# Altium PCB STM8S103_FM1702.PcbDoc
Units mil, origin at the board's own origin, x right, y up, seen from the top; angles counter-clockwise.
Board outline 2660.03 x 1670.03 mil, 2 copper layers (Top Layer, Bottom Layer); 63 components, 54 nets, 258 pads, 49 vias.
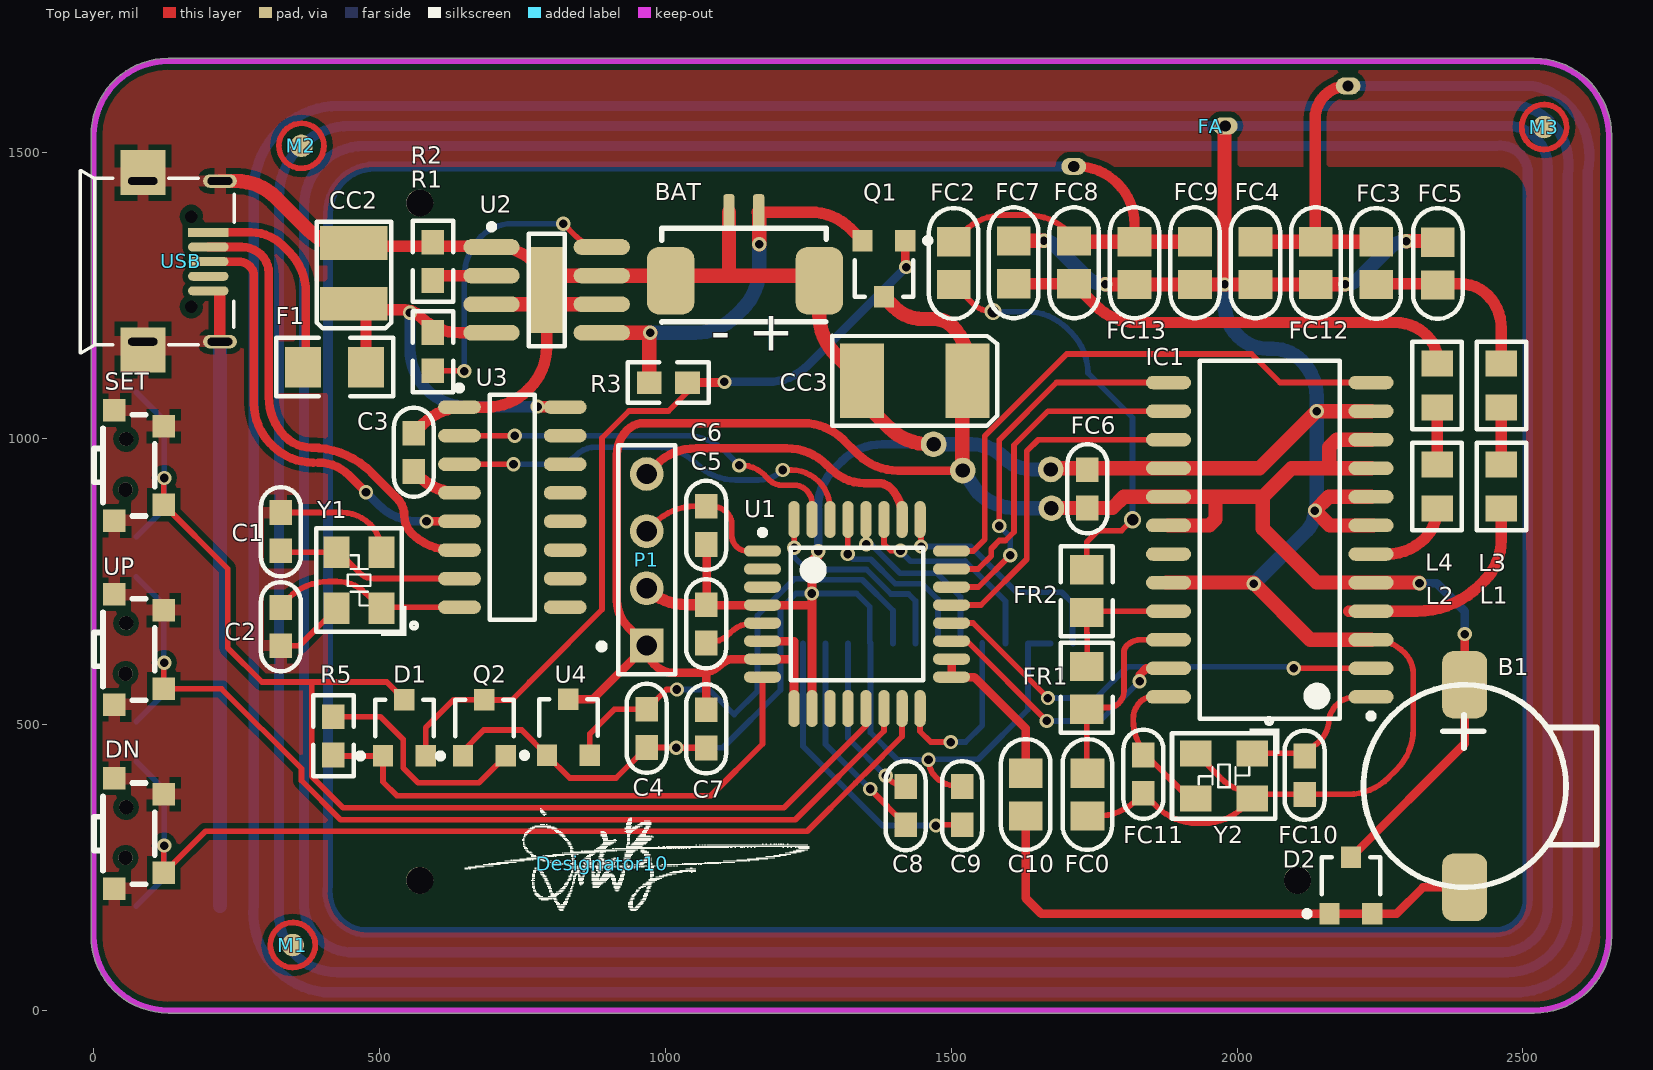
[diagram p0: Top Layer view]
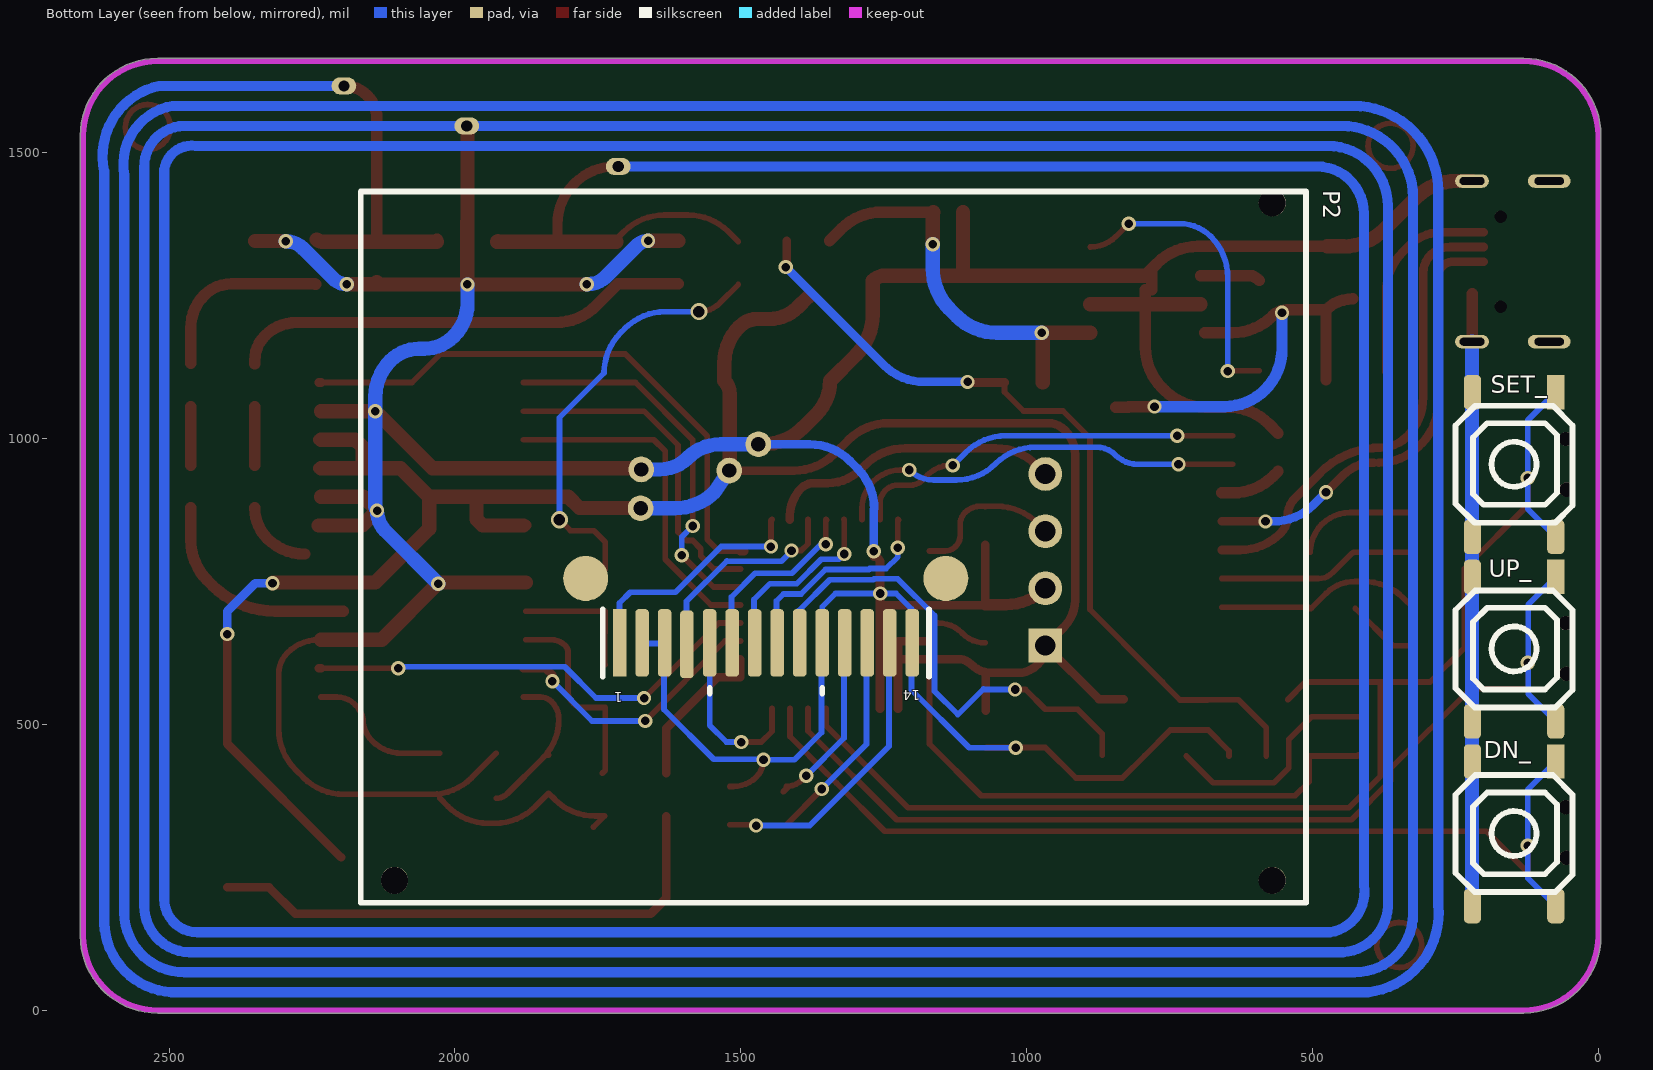
[diagram p1: Bottom Layer view, seen from below]
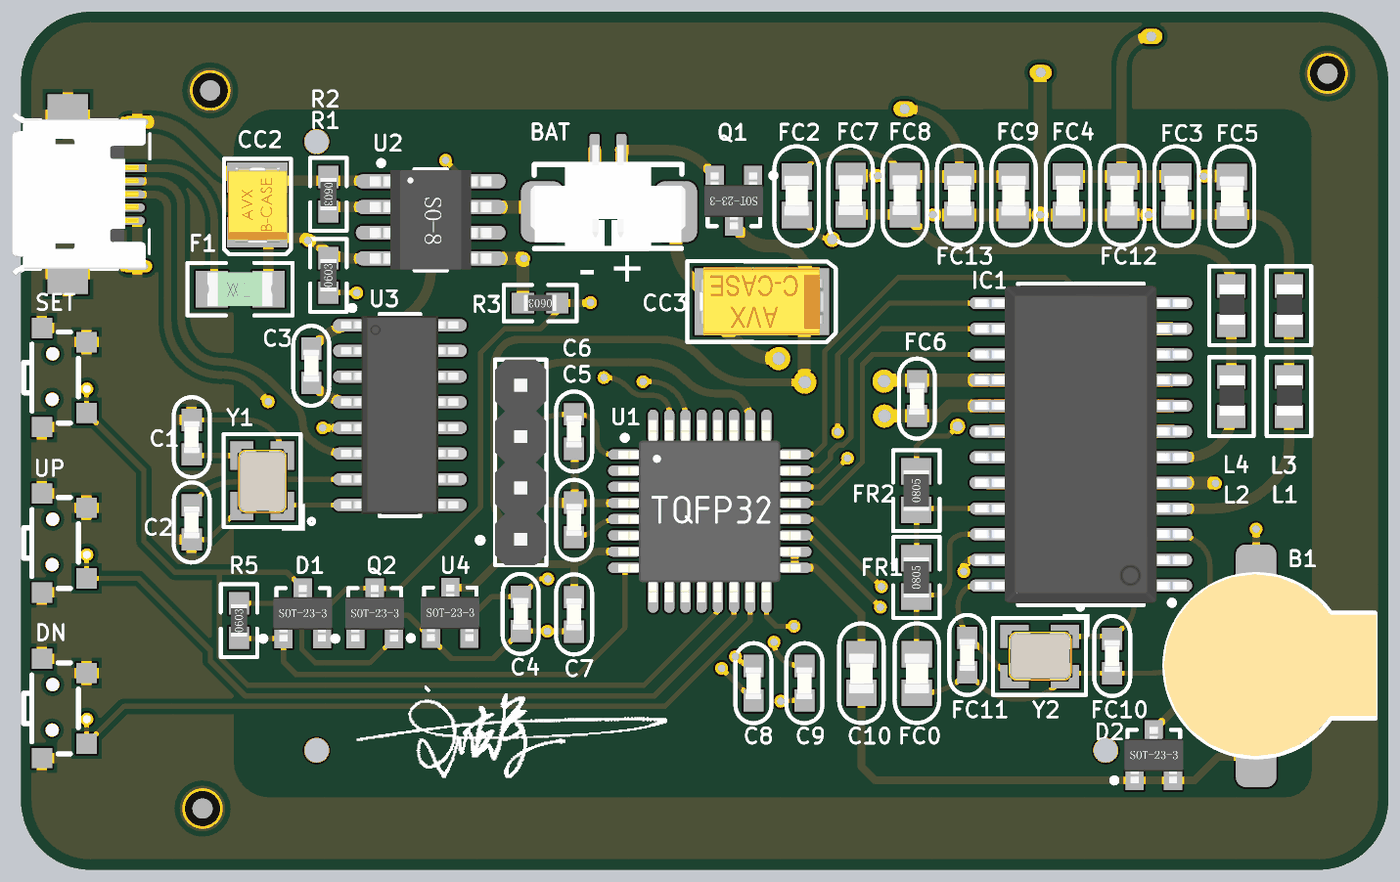
[diagram p2: 3D render of the assembled board from above, using the file's embedded part models]
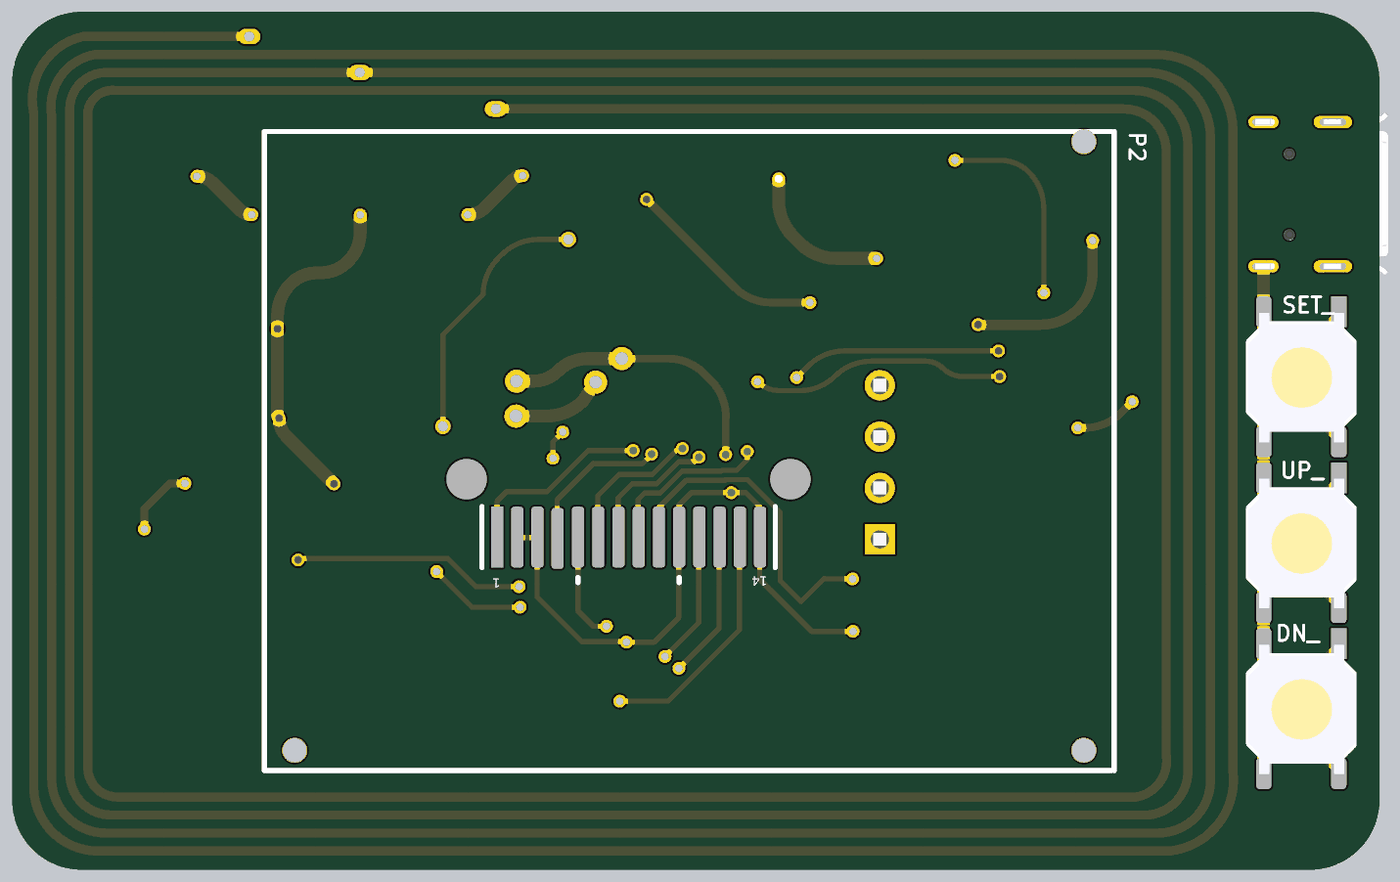
[diagram p3: 3D render of the assembled board from below, using the file's embedded part models]

## Layer stack, top to bottom
Top Solder: solder mask 0.4, Solder Resist, Dk 3.5
Top Layer: signal copper 1.4
Dielectric1: dielectric 12.6, FR-4, Dk 4.8
Bottom Layer: signal copper 1.4
Bottom Solder: solder mask 0.4, Solder Resist, Dk 3.5

## Board outline
-4.45,117.69 cw(c0,120) -5.02,120 -5.02,1530 cw(c130,1530) 130,1665.02 2520,1665.02 cw(c2520,1530) 2655.02,1530 2655.02,130 cw(c2520,130) 2520,-5.01 130,-5.01 cw(c130,130)

## Design rules (kind name [scope] priority, off if disabled: settings)
Clearance poly [inpolygon] p1: gap=10
Clearance [All] p2: gap=8
ComponentClearance [All] p1: gap=0 collisioncheckmode=3 verticalgap=0 showdistances=FALSE
FabricationTestPointUsage TestPointUsage [All] p1: valid=0 allowmultiple=FALSE
FabricationTestpoint Testpoint [All] p1: side=3 testpointundercomponent=TRUE minsize=40 maxsize=100 preferedsize=60 minholesize=0 maxholesize=40 preferedholesize=32 testpointgrid=1 allowsidetop=TRUE allowsidebottom=TRUE usegrid=TRUE gridtolerance=0.01
HoleSize [All] p1: absolutevalues=TRUE maxlimit=150 minlimit=10 maxpercent=80.000 minpercent=20.000
PolygonConnect [All] p1: connectstyle=Relief reliefconductorwidth=20 reliefentries=4 polygonreliefangle="90 Angle" airgapwidth=10
RoutingVias [All] p1: holewidth=28 width=50 viastyle="Through Hole" minholewidth=28 minwidth=50 maxholewidth=28 maxwidth=50
SilkToSilkClearance [All] p1: silktosilkclearance=0
SolderMaskExpansion [All] p1: expansion=4
UnpouredPolygon [All] p1: allowunpoured=FALSE
Width [All] p1: maxlimit=50 minlimit=10 preferedwidth=20 bottomlayer_prefwidth=10 minimp=50.000000 maximp=50.000000 favimp=50.000000
24 further rules are at their usual default settings.

## Components (designator, comment, footprint, x,y, rotation, side; value= is the part's Value field where it differs from the comment)
B1 "BUZZER" BUZZ_9025 2398,392 r90 top
BAT "Battery" HX1.25-2 1289,1405 r180 top
C1 "C0603" C0603 327,837 r90 top
C2 "C0603" C0603 327,671 r270 top
C3 "C0603" C0603 559.57,976 r270 top
C4 "C0603" C0603 967,493 r270 top
C5 "C0603" C0603 1071,676 r90 top
C6 "C0603" C0603 1071,848 r270 top
C7 "C0603" C0603 1071,492 r270 top
C8 "C0603" C0603 1420,358 r90 top
C9 "C0603" C0603 1519,358 r90 top
C10 "C0805" C0805 1630,377 r90 top
CC2 "Cap Tan B" TAN-B-3528 455,1289 r270 top
CC3 "Cap Tan C" TAN-C-6032 1436,1101 r0 top
D1 "BAS40_5" SOT-23 543,494 r0 top
D2 "BAS40_5" SOT-23 2199,218 r0 top
Designator10 "Comment" LOGO 889,257 r0 top
DN "Button" BUTTON_SMD 79,309 r90 top
DN_ "Button" SWITCH_SMD 147,309 r270 bottom
F1 "300mA" F1206 421,1125 r0 top
FA "FM1702_Antenna" FM1702_ANTENNA 1834,1436 r180 top locked
FC0 "C0805" C0805 1738,377 r90 top
FC2 "C0805" C0805 1504,1307 r270 top
FC3 "C0805" C0805 2243.29,1307 r270 top
FC4 "C0805" C0805 2031.86,1307 r90 top
FC5 "C0805" C0805 2351,1306 r90 top
FC6 "C0603" C0603 1738,912 r90 top
FC7 "C0805" C0805 1609,1308 r270 top
FC8 "C0805" C0805 1714.71,1308 r270 top
FC9 "C0805" C0805 1926.14,1307 r90 top
FC10 "C0603" C0603 2118,411 r270 top
FC11 "C0603" C0603 1836,413 r270 top
FC12 "C0805" C0805 2137.57,1307 r90 top
FC13 "C0805" C0805 1820.43,1307 r90 top
FR1 "?" R0805 1737,564 r90 top
FR2 "?" R0805 1737,733 r90 top
IC1 "FM1702" SOP-24L 2057,823 r180 top
L1 "Inductor Chip" L2013-0805 2462,916 r90 top
L2 "Inductor Chip" L2013-0805 2350,916 r90 top
L3 "Inductor Chip" L2013-0805 2462,1093 r90 top
L4 "Inductor Chip" L2013-0805 2350,1093 r90 top
M1 "Mark" MARK 348,114 r180 top
M2 "Mark" MARK 363,1512 r180 top
M3 "Mark" MARK 2537,1545 r180 top
P1 "Header 4" HDR1X4 967,638 r90 top
P2 "SOG_12864" SOG12864 511,1432 r0 bottom
Q1 "IRLML6401" SOT-23 1382,1297 r180 top
Q2 "NPN-SMT" SO-G3/C2.5 683,494 r0 top
R1 "?" R0603 593,1152 r90 top
R2 "?" R0603 593,1310 r270 top
R3 "?" R0603 1005,1098 r180 top
R5 "?" R0603 419,480 r90 top
SET "Button" BUTTON_SMD 79,953 r90 top
SET_ "Button" SWITCH_SMD 147,955 r270 bottom
U1 "STM8S105KXT6C" TQFP-32AN 1335,693 r0 top
U2 "TP4056" SOP-8PAD 792,1260 r0 top
U3 "CH340G" SOP-16L 732,880 r0 top
U4 "XC6206_3.3V" SOT-23 830,495 r0 top
UP "Button" BUTTON_SMD 79,631 r90 top
UP_ "Button" SWITCH_SMD 147,632 r270 bottom
USB "USB" USB-B_Micro 153,1310 r0 top
Y1 "CRYSTAL" X3225 464,752 r90 top
Y2 "CRYSTAL" X3225 1977,410 r180 top

## Footprints (in the part's own frame and the unit in brackets; to place one, negate y for a bottom-side part, rotate by r counter-clockwise, add the part's x,y. Pads: shape width x height; smd on the part's side, far side on the other; paste and mask are expansions set on the pad)
BUTTON_SMD [mm]
  round 0.635 hole 0.635: 0(-1.075,0.6) 0(1.175,0.575)
  rect 1x1 smd: 1(-2.45,1.1) 1(1.75,-1.1) 1(2.45,1.1) 2(-1.75,-1.1)
  silkscreen extent -2.25,-0.7 2.25,2
BUZZ_9025 [mm]
  rrect50% 3x2 smd: 1(-4.5,0) 2(4.5,0)
  silkscreen extent -4.5,-5.87 4.5,4.5, body extent -4.47,-5.94 4.53,4.56, height 4
C0603 [mm]
  rect 1.1x1 smd: 1(-0.85,0) 2(0.85,0)
  silkscreen extent -1.98,-0.89 1.98,0.89, body extent -0.8,-0.4 0.8,0.4, height 0.3
C0805 [mm]
  rect 1.3x1.5 smd: 1(-0.95,0) 2(0.95,0)
  silkscreen extent -2.45,-1.1 2.47,1.1, body extent -1,-0.62 1,0.63, height 0.5
F1206 [mm]
  rect 1.6x1.8 smd: 1(-1.4,0) 2(1.4,0)
  silkscreen extent -2.6,-1.3 2.6,1.3, body extent -1.6,-0.83 1.6,0.83, height 0.56
FM1702_ANTENNA [mil]
  oval 43.31x30 hole 19.68: 1(-360,-180.94) 2(-145,-110.94) 3(120,-40)
  Bottom Layer lines w17.72: 120,-40 1342.11,-40 ccw(c1342.11,42.17) 1424.28,42.17 1424.28,1217.7 ccw(c1353.78,1229.2) 1365.28,1299.7 -616.32,1299.7 ccw(c-616.32,1241.7) -674.32,1241.7 -674.32,-34.3 ccw(c-625.99,-27.63) -619.32,-75.96 1361.15,-75.96 ccw(c1361.15,29.17) 1466.28,29.17 1466.28,1244.7 ccw(c1381.78,1250.2) 1387.28,1334.7 -629.72,1334.7 ccw(c-628.52,1253.9) -709.32,1252.7 -709.32,-38.14 ccw(c-637.94,-39.58) -639.39,-110.96 1385.27,-110.96 ccw(c1385.27,14.04) 1510.28,14.04 1510.28,1268.71 ccw(c1408.65,1268.07) 1408.02,1369.7 -638.72,1369.7 ; -360,-180.94 -683.39,-180.96 cw(c-657.02,-58.66) -779.32,-32.3 -779.32,1283.7 cw(c-654.02,1279.4) -649.73,1404.7 1431.28,1404.7 cw(c1415.74,1266.17) 1554.28,1250.64 1554.28,3.17 cw(c1405.15,3.17) 1405.15,-145.96 -660.06,-145.96 cw(c-641.86,-43.5) -744.32,-25.3 -744.32,1265.3 cw(c-639.32,1264.7) -638.73,1369.7
HDR1X4 [mm] "Connector; Header; 4 Position"
  rect 1.5x1.5 hole 0.9: 1(0,0)
  round 1.5 hole 0.9: 2(2.54,0) 3(5.08,0) 4(7.62,0)
  silkscreen extent -1.27,-1.27 8.89,2.14, body extent -1.27,-1.27 8.89,1.27, height 8.54
HX1.25-2 [mil] "53261(white colored)"
  rrect50% 82.68x118.11 smd: 0(20,129) 0(280,129)
  rrect50% 19.68x62.99 smd: 1(126,9) 2(178,9)
  silkscreen extent 8,37 295,201, body extent 1,0 303,204, height 138
L2013-0805 [mm]
  rect 1.15x1.4 smd: 1(-0.975,0) 2(0.975,0)
  silkscreen extent -1.95,-1.1 1.95,1.1, body extent -0.95,-0.65 1.05,0.6, height 0.5
LOGO [mil]
  silkscreen extent -240,-82 362,96
MARK [mm]
  round 1 smd mask+0.5: 1(0,0)
  Top Layer lines w0.254: 1,-0.018 ccw(c0,0) 1,-0.019
R0603 [mm]
  rect 1.1x1 smd: 1(-0.85,0) 2(0.85,0)
  silkscreen extent -1.8,-0.9 1.8,0.9, body extent -0.8,-0.4 0.8,0.4, height 0.45
R0805 [mm]
  rect 1.3x1.5 smd: 1(-0.95,0) 2(0.95,0)
  silkscreen extent -2,-1.15 2,1.15, body extent -1,-0.63 1,0.63, height 0.55
SO-G3/C2.5 [mm]
  rect 0.9x0.95 smd: 1(-0.95,-1.25) 2(0.95,-1.25) 3(0,1.25)
  silkscreen extent -2.07,-1.37 1.3,1.25, body extent -1.45,-1.4 1.45,1.4, height 1.2
SOG12864 [mm]
  round 1.2 hole 1.2: 0(1.5,0.5) 0(1.5,30.6) 0(40.5,30.6)
  round 2 smd: 0(16.002,17.19) 0(32.004,17.19)
  rect 0.6x3 smd: 1(30.5,20.054)
  rrect50% 0.6x3 smd: 2(29.5,20.054) 3(28.5,20.054) 4(27.508,20.117) 5(26.5,20.054) 6(25.5,20.054) 7(24.5,20.054) 8(23.5,20.054) 9(22.5,20.054) 10(21.5,20.054) 11(20.5,20.054) 12(19.5,20.054) 13(18.5,20.054) 14(17.5,20.054)
  silkscreen extent 0,0 42,31.6, body extent 0,0 42.01,31.6, height 2.6
SOP-8PAD [mm]
  oval 2.5x0.7 smd: 1(-2.45,1.905) 2(-2.45,0.635) 3(-2.45,-0.635) 4(-2.45,-1.905) 5(2.45,-1.905) 6(2.45,-0.635) 7(2.45,0.635) 8(2.45,1.905)
  rect 1.524x3.81 smd: 9(0,0)
  silkscreen extent -2.57,-2.5 0.8,2.93, body extent -3,-2.45 3,2.45, height 1.7
SOP-16L [mm] "SOIC, 16-Leads, Body 9.9x3.9mm, Pitch 1.27mm, IPC High Density"
  oval 1.9x0.6 smd: 1(-2.35,4.445) 2(-2.35,3.175) 3(-2.35,1.905) 4(-2.35,0.635) 5(-2.35,-0.635) 6(-2.35,-1.905) 7(-2.35,-3.175) 8(-2.35,-4.445) 9(2.35,-4.445) 10(2.35,-3.175) 11(2.35,-1.905) 12(2.35,-0.635) 13(2.35,0.635) 14(2.35,1.905) 15(2.35,3.175) 16(2.35,4.445)
  silkscreen extent -2.47,-5 1,5.42, body extent -2.91,-4.89 2.89,4.91, height 1.75
SOP-24L [mm] "SOIC, 24-Leads, Body 15.4x7.5mm, Pitch 1.27mm, IPC High Density"
  oval 2x0.6 smd: 1(-4.5,6.985) 2(-4.5,5.715) 3(-4.5,4.445) 4(-4.5,3.175) 5(-4.5,1.905) 6(-4.5,0.635) 7(-4.5,-0.635) 8(-4.5,-1.905) 9(-4.5,-3.175) 10(-4.5,-4.445) 11(-4.5,-5.715) 12(-4.5,-6.985) 13(4.5,-6.985) 14(4.5,-5.715) 15(4.5,-4.445) 16(4.5,-3.175) 17(4.5,-1.905) 18(4.5,-0.635) 19(4.5,0.635) 20(4.5,1.905) 21(4.5,3.175) 22(4.5,4.445) 23(4.5,5.715) 24(4.5,6.985)
  silkscreen extent -4.62,-7.95 3.1,7.96, body extent -5.23,-7.85 5.23,7.85, height 1.78
SOT-23 [mm]
  rect 0.9x0.95 smd: 1(-0.95,-1.25) 2(0.95,-1.25) 3(0,1.25)
  silkscreen extent -2.07,-1.37 1.3,1.25, body extent -1.45,-1.4 1.45,1.4, height 1.2
SWITCH_SMD [mil]
  rrect50% 60x30 smd: 1(-126,-73) 1(127,-73) 2(127,73)
  rect 60x30 smd: 2(-126,73)
  silkscreen extent -102,-102 102,102, body extent -124,-103 128,105, height 59
TAN-B-3528 [mm]
  rect 1.5x3 smd: 1(-1.35,0) 2(1.35,0)
  silkscreen extent -2.29,-1.65 2.44,1.65, body extent -1.85,-1.47 1.85,1.46, height 2.03
TAN-C-6032 [mm]
  rect 1.95x3.3 smd: 1(-2.35,0) 2(2.35,0)
  silkscreen extent -3.68,-2.01 3.66,2, body extent -3.05,-1.68 3.05,1.67, height 2.7
TQFP-32AN [mm] "Thin QFP, 32-Leads, Body 7x7mm, Pitch 0.8mm, IPC Medium Density"
  oval 1.65x0.508 smd: 1(-4.2,2.8) 2(-4.2,2) 3(-4.2,1.2) 4(-4.2,0.4) 5(-4.2,-0.4) 6(-4.2,-1.2) 7(-4.2,-2) 8(-4.2,-2.8) 17(4.2,-2.8) 18(4.2,-2) 19(4.2,-1.2) 20(4.2,-0.4) 21(4.2,0.4) 22(4.2,1.2) 23(4.2,2) 24(4.2,2.8)
  oval 0.508x1.65 smd: 9(-2.8,-4.2) 10(-2,-4.2) 11(-1.2,-4.2) 12(-0.4,-4.2) 13(0.4,-4.2) 14(1.2,-4.2) 15(2,-4.2) 16(2.8,-4.2) 25(2.8,4.2) 26(2,4.2) 27(1.2,4.2) 28(0.4,4.2) 29(-0.4,4.2) 30(-1.2,4.2) 31(-2,4.2) 32(-2.8,4.2)
  silkscreen extent -4.32,-2.95 2.95,3.75, body extent -4.52,-4.52 4.5,4.5, height 1.1
USB-B_Micro [mm]
  rect 1.8x0.4 smd: 1(1.198,1.287)
  oval 1.8x0.4 smd: 2(1.198,0.637) 3(1.198,-0.013) 4(1.198,-0.663) 5(1.198,-1.313)
  oval 1.9x0.6 hole 0.35 slot 1.3 at 0 deg: 6(-1.714,3.569) 7(-1.714,-3.569)
  rect 2x2 smd: 6(-1.702,3.937) 7(-1.702,-3.937)
  oval 1.5x0.6 hole 0.35 slot 1.1 at 0 deg: 6(1.714,3.569) 7(1.714,-3.569)
  round 0.5 hole 0.55 unplated: 8(0.445,1.987) 9(0.445,-2.013)
  silkscreen extent -4.49,-4.06 2.35,4.04, body extent -4.46,-4.03 2.16,4.05, height 2.7
X3225 [mm]
  rect 1.4x1.15 smd: 1(-1.25,-1) 2(1.25,-1) 3(1.25,1) 4(-1.25,1)
  silkscreen extent -2.46,-2.57 2.31,1.9, body extent -1.63,-1.27 1.57,1.23, height 0.6

## Part data
BAT: library part Battery-N, "Multicell Battery"
C1 C2 C3 C4 C5 C6 C7 C8 C9 C10 CC2 CC3 FC0 FC2 FC3 FC4 FC5 FC6 FC7 FC8 FC9 FC10 FC11 FC12 FC13: "Polarized Capacitor (Radial)"
D1 D2: "Default Diode"
F1: library part Fuse, "Fuse"
FR1 FR2: library part R0805
L1 L2 L3 L4: "Inductor"
P1: "Header, 4-Pin"
Q1: "P-Channel Power MOSFET"
Q2: "NPN Bipolar Transistor"
R1 R2 R3 R5: library part R0603
U1: library part STM8S105K4T6C, "ST 8-bit  Microcontroller"
U4: library part XC6206, "POSITIVE OUTPUT VOLTAGE"
Y1 Y2: "Crystal Oscillator"

## Free pads (board coordinates)
  round 45 hole 25: 0(1469,990) 0(1520,944) 0(1674,946) 0(1675,878)

## Via types
v1: diameter 25, hole 15, Top Layer to Bottom Layer, 47 vias
v2: diameter 30, hole 20, Top Layer to Bottom Layer, 2 vias

## Nets (pads, with @x,y where several pads share a name; then routed paths per layer and width w, separated by ;. In a path a pad name is that pad's centre, name@x,y a point inside that pad or via, vN(x,y) a via of type N, cw(c..) or ccw(c..) an arc to the next point about the centre after c; other vN are vias at no path point)
+3.3V: C4.1 P2.9 U4.2 | length 875.7
  Top Layer w10: U4.2 867.4,483.4 910.46,526.46 C4.1 1001.54,561 v1(1020,561)
  Bottom Layer w10: v1(1020,561) 1074,561 1075,562 1120,517 1161,558 1161,690.3 1225.2,754.5 1266.56,754.5 1268.06,753 1344,753 1397.83,699.17 P2.9@1397.83,641.48
+3.7V: BAT.1 Q1.2 R3.2 U2.5 | length 721.9
  Top Layer w20: BAT.1 1253.39,1396 cw(c1253.39,1296) 1324.1,1366.71 Q1.2
  Top Layer w25: U2.5 v1(973.06,1185) ccw(c976.74,1181.32) 971.54,1181.32 R3.2 ; BAT.1 cw(c1160.59,1393.59) 1164,1393.59 v1(1164,1340)
  Bottom Layer w25: v1(973.06,1185) 1051.58,1185 ccw(c1051.58,1285) 1122.29,1214.29 1134.71,1226.71 ccw(c1064,1297.42) 1164,1297.42 v1(1164,1340)
BEEP: C10.2 U1.17 U1.18 | length 276.9
  Top Layer w15: U1.18 U1.17 1540.24,582.76 1630,493 C10.2
CH_RX: U1.30 U3.3 | length 733.9
  Top Layer w10: U3.3 v1(734,955) ; v1(1205,945) 1219.72,945 cw(c1219.72,876.72) 1268,925 cw(c1220.31,877.31) 1287.76,877.31 U1.30
  Bottom Layer w10: v1(734,955) 805.37,955 ccw(c805.37,1009.63) 844,971 cw(c877.8,937.2) 877.8,985 983.99,985 cw(c983.99,885.99) 1054,956 ccw(c1122.81,1024.81) 1122.81,927.5 1162.75,927.5 ccw(c1162.75,987.25) 1186.17,932.28 ccw(c1162.75,987.25) v1(1205,945)
CH_TX: U1.31 U3.2 | length 692.3
  Top Layer w10: U3.2 v1(736,1005) ; v1(1129,953) 1129,954.07 cw(c1129,890.93) 1173.65,935.58 1182.05,927.17 ccw(c1202.99,948.12) 1202.99,918.5 1224.44,918.5 cw(c1224.44,886.62) 1234.52,916.86 cw(c1224.44,886.62) 1246.98,909.16 cw(c1224.58,886.76) 1252.92,900.93 cw(c1224.58,886.76) 1256.26,886.76 U1.31
  Bottom Layer w10: v1(736,1005) 1035.58,1005 cw(c1035.58,905) 1106.29,975.71 v1(1129,953)
DN: DN.2 DN_.2 U1.15 | length 1781
  Top Layer w10: v1(123,288) 122.31,287.31 DN.2 195.2,313 1248,313 1332.5,397.5 1332.5,397.56 1347.44,412.5 1347.5,412.5 1413.74,478.74 U1.15
  Bottom Layer w10: DN_.2@74,182 123,231 v1(123,288) 123,386 DN_.2@74,435
FM_CS: IC1.15 U1.21 | length 610
  Top Layer w10: U1.21 1551.81,708.75 1632,788.94 1632,978 1652,998 IC1.15
FM_IRQ: IC1.2 U1.20 | length 816
  Top Layer w10: U1.20 1537.75,677.25 v1(1669,546) ; v1(2099,598) IC1.2
  Top Layer w15: IC1.2 IC1.2@2238.1,598
  Bottom Layer w10: v1(1669,546) 1753,546 1807.81,600.81 2096.19,600.81 v1(2099,598)
FM_RST: IC1.23 U1.19 | length 485.9
  Top Layer w10: U1.19 1527.24,645.76 v1(1667,506)
  Top Layer w15: v1(1829.31,575.31) 1829.31,586.31 1841,598 IC1.23
  Bottom Layer w10: v1(1667,506) 1760,506 v1(1829.31,575.31) v1@1833.31,575.31
GND: BAT.2 C1.2 C2.2 C3.1 C4.2 C5.2 C6.2 C7.2 C9.2 CC2.1 CC3.1 DN.1 DN_.1 FA.2 FC0.1 FC4.1 FC5.2 FC6.2 FC7.1 FC9.1 FC10.2 FC11.2 FC12.1 FC13.1 IC1.3 IC1.7 IC1.8 IC1.11 IC1.16 IC1.20 P1.2 P2.2 P2.3 P2.10 P2.14 pad.0@1469,990 pad.0@1674,946 Q2.1 R2.1 SET.1 SET_.1 U1.4 U1.10 U2.1 U2.3 U2.6 U2.7 U2.9 U3.1 U4.1 UP.1 UP_.1 USB.5 USB.6 USB.7 Y1.2 Y1.4 Y2.2 Y2.4 | length 10849.4
  Top Layer w10: C1.2@324,870.46 434.12,870.46 cw(c434.12,801.21) Y1.2 ; C2.2 359.38,637.54 Y1.4 ; Q2.1 645.6,453.6 682,490 748.39,490 U4.1 832.39,406 913.46,406 C4.2 v1@1025.46,459.54 ; v1(1460,438) ccw(c1502.17,438) 1472.35,408.18 ccw(c1512.71,448.53) 1478.53,402.83 ccw(c1512.71,448.53) 1512.71,391.46 C9.2 ; FC0.1@1757.31,320.29 FC0.1 1754.64,339.6 ccw(c1754.64,439.6) 1825.35,368.89 FC11.2 1859.25,356.29 ccw(c1929.96,427) 1929.96,327 1941.16,327 ccw(c1941.16,427) 2011.87,356.29 Y2.4 ; Y2.2 1970.33,406.82 ccw(c2041.04,477.54) 2041.04,377.54 FC10.2 2194.11,377.54 ccw(c2194.11,477.54) 2264.82,406.82 2278.71,420.71 ccw(c2208,491.42) 2308,491.42 2308,588.79 ccw(c2256.79,588.79) 2293,625 ccw(c2237.47,569.47) 2237.47,648 IC1.3 ; FC12.1@2132.68,1274.49 FC12.1@2136.39,1278.2 ; v1@1025.46,459.54 1026.46,458.54 C7.2 1070,459.54 v1@1025.46,459.54
  Top Layer w15: USB.7@200.17,1171.51 ccw(c203.01,1171.51) USB.7@201,1169.5 ; C6.2@1072,814.54 1072,709.46 1072.72,708.75 U1.4 1256,708.75 ; v1(1256,729) 1256,782.71 cw(c1266.29,782.71) 1256.26,785.01 ; U1.10 1256.26,785.01 ; v1(1267,803) 1267,793.71 1266.29,793 ccw(c1266.29,782.71) 1256.26,785.01
  Top Layer w20: USB.7@201,1169.5 USB.7@220,1169.5 ; USB.7@220.5,1169.5 USB.5@220.5,1253 ; CC2.1@474,1336.15 700.43,1336.15 cw(c700.43,1236.15) 771.14,1306.86 U2.9@781,1297 ; C3.1@560,1009.46 576.25,1025.71 cw(c646.96,955) 646.96,1055 687.58,1055 ccw(c687.58,1155) 758.29,1084.29 762.71,1088.71 ccw(c692,1159.42) 792,1159.42 792,1235 U2.9 ; U2.9@781,1260 U2.9@781,1297 ; U2.9@793,1285 U2.9@781,1297 ; P1.2 ccw(c1035.89,806.89) 1035.89,709.46 C5.2 C5.2@1072,709.46
  Top Layer w25: USB.6@220.5,1450.5 248.08,1450.5 cw(c248.08,1350.5) 318.79,1421.21 374.56,1365.44 ccw(c445.27,1436.15) 445.27,1336.15 CC2.1@474,1336.15 ; U2.3 792,1235 U2.6 ; U2.9@793,1285 U2.7 1111,1285 ; BAT.2 1111,1285 ; pad.0@1469,990 1461.42,990 cw(c1461.42,1090) 1390.71,1019.29 1367.86,1042.14 cw(c1426.72,1101) CC3.1 1298.29,1146.19 cw(c1369,1216.9) 1269,1216.9 1269,1276 ccw(c1247.27,1254.27) 1247.27,1285 1111,1285 ; FC7.1 cw(c1610.45,1343.96) 1610.45,1346 v1(1662,1346) ; pad.0@1674,946 cw(c1678.83,941.17) 1678.83,948 IC1.16 2039,948 v1(2139,1048) IC1.11 ; v1(1769,1270) ccw(c1769.97,1270.97) 1769.97,1269.6 FC13.1 FC9.1 v1(1978,1269.6) ; IC1.20@1875.9,748 IC1.20 2028,748 2128,648 IC1.3 ; FA.2@1979,1546 1978,1545 1978,1379.48 1978.17,1379.31 1978.17,1269.77 v1(1978,1269.6) ; FC12.1@2136.39,1273.51 ccw(c2144.87,1281.99) 2144.87,1270 v1(2189,1270) ; FC12.1 FC4.1 v1(1978,1269.6) ; IC1.8 2160,898 v1(2136,874) 2162,848 IC1.7@2238.1,848 ; v1(2296,1345) cw(c2296.97,1344.03) 2296.97,1345.4 FC5.2@2349,1345.4
  Bottom Layer w10: v1(1019,459) 1100,459 1200.98,559.98 1200.98,701.98 1228,729 v1(1256,729) 1334,729 1357.46,705.54 P2.10 ; P2.10@1358.46,642.48 1358.46,485.54 1406,438 v1(1460,438) ; v1@1460,439 1547,439 1634.05,526.05 1634.05,641.48 P2.2@1673.42,641.48
  Bottom Layer w15: v1(1267,803) 1267,876.16 1266.29,876.87 cw(c1366.29,876.87) 1270,903.86 cw(c1366.29,876.87) 1295.58,947.58 1308.71,960.71 cw(c1379.42,890) 1379.42,990 pad.0@1469,990
  Bottom Layer w25: DN_.1@220.5,182.5 USB.7@220.5,1169.5 ; pad.0@1469,990 1535.06,990 cw(c1535.06,908.06) 1593,966 ccw(c1641.28,1014.28) 1641.28,946 pad.0@1674,946 ; v1(1662,1346) cw(c1662,1319.44) 1680.78,1338.22 1736,1283 ccw(c1767.38,1314.38) 1767.38,1270 v1(1769,1270) ; v1(1978,1269.6) 1978,1235.53 ccw(c2056.53,1235.53) 2001,1180 2002.79,1178.21 ccw(c2054,1229.43) 2054,1157 2062.3,1157 cw(c2062.3,1085.3) 2113,1136 cw(c2050.23,1073.23) 2139,1073.23 v1(2139,1048) 2139,881.24 cw(c2128.76,881.24) v1(2136,874) cw(c2085.3,874) 2121.15,838.15 v1(2029,746) ; v1(2189,1270) ccw(c2189,1303.8) 2212.9,1279.9 2265.27,1332.27 cw(c2296,1301.54) v1(2296,1345)
LCD_A0: P2.6 U1.28 | length 328.7
  Top Layer w10: U1.28 1350,857.61 1351,856.61 v1(1351,815)
  Bottom Layer w10: v1(1351,815) 1359.46,815 1410.22,764.23 1474.77,764.23 1515.94,723.06 P2.6@1515.94,641.48
LCD_CSB: P2.4 U1.27 | length 370.5
  Top Layer w10: U1.27 1382.24,815.76 1394,804 v1(1411,804)
  Bottom Layer w10: v1@1411,803 1428.5,785.5 1523.5,785.5 1524,786 1594.68,715.32 P2.4@1594.68,641.48
LCD_LEDA: P2.1 U1.25 | length 424.5
  Top Layer w10: U1.25 1447,856.59 v1(1447,811)
  Bottom Layer w10: v1(1447,811) 1534,811 1614,731 1693,731 1711.79,712.21 P2.1 ; P2.1@1712.79,641.48 P2.1@1712.79,642.48
LCD_POW: D1.1 R5.1 U1.8 | length 961.5
  Top Layer w10: R5.1 420.75,444.79 D1.1 505.6,399.4 530,375 1079,375 1169.65,465.65 U1.8
LCD_RESET: P2.5 U1.16 | length 313
  Top Layer w10: U1.16 1445.24,487.76 1464,469 v1(1499,469)
  Bottom Layer w10: v1(1499,469) 1525,469 1554.31,498.31 P2.5
LCD_SCL: P2.7 U1.29 | length 327.9
  Top Layer w10: v1(1319,798) 1319,858.1 U1.29
  Bottom Layer w10: v1(1319,798) 1328,789 1358.91,789 1401.68,746.23 1448.77,746.23 1476.57,718.43 P2.7@1476.57,641.48
LCD_SDA: P2.8 U1.32 | length 384.7
  Top Layer w10: U1.32 1224,857.59 1225,856.59 v1(1225,809)
  Bottom Layer w10: v1(1225,809) 1225,793 1245.5,772.5 1274.02,772.5 1275.52,771 1351.46,771 1394.22,728.23 1425,728.23 1437.2,716.04 P2.8@1437.2,641.48
MISO: IC1.12 U1.24 | length 1014.3
  Top Layer w10: U1.24 1538.24,803.24 1558.5,823.5 1558.5,1004.5 1702,1148 2025,1148 2075,1098 IC1.12
  Top Layer w15: U1.24@1493.35,803.24 U1.24 ; IC1.12 IC1.12@2238.1,1098
MOSI: IC1.14 U1.23 | length 590.3
  Top Layer w10: U1.23 1546.74,771.74 1569.73,794.73 1569.73,807.27 1583.96,821.5 1594.56,821.5 1609.5,836.44 1609.5,988.5 1669,1048 IC1.14
NetB1_1: B1.1 C10.1 D2.1 D2.2 | length 941.9
  Top Layer w15: C10.1 1630,196 1657.21,168.79 D2.1 2278.79,168.79 2324.83,214.83 B1.1
NetC1_1: C1.1 U3.7 Y1.3 | length 352.3
  Top Layer w10: C1.1@324,803.54 ccw(c329.61,809.14) 329.61,801.21 Y1.3 cw(c424.63,791.18) Y1.3@431.72,798.28 ; Y1.3@431.73,798.27 465,765 ccw(c489.14,789.14) 489.14,755 U3.7@658.48,755
NetC2_1: C2.1 U3.8 Y1.1 | length 366
  Top Layer w10: C2.1@324,704.46 340.25,720.71 cw(c410.96,650) 410.96,750 425,750 cw(c425,677.57) 476.21,728.79 501.39,703.61 ccw(c503.37,705.58) Y1.1 cw(c508.71,697.45) 508.71,705 U3.8@658.48,705
NetC3_2: C3.2 U3.4 | length 109.7
  Top Layer w20: C3.2@560,942.54 568.25,934.29 ccw(c638.96,1005) 638.96,905 U3.4@658.48,905
NetC8_1: C8.1 P2.12 | length 375.1
  Top Layer w10: v1(1358,387) 1358,386.54 C8.1
  Bottom Layer w10: P2.12@1279.72,641.48 1279.72,465.28 v1(1358,387)
NetC8_2: C8.2 P2.11 | length 317.7
  Top Layer w10: v1@1382,413 1391.89,403.11 ccw(c1420,431.21) C8.2@1415.77,391.69 ; C8.2 cw(c1420,431.21) C8.2@1415.77,391.69 ; C8.2@1425.46,382 C8.2@1415.77,391.69
  Bottom Layer w10: P2.11@1319.09,641.48 1319.09,475.91 v1(1385,410)
NetC9_1: C9.1 P2.13 | length 517.4
  Top Layer w10: v1@1473,317.81 v1(1473,323) ; v1@1476.71,324.54 C9.1
  Bottom Layer w10: P2.13@1240.35,641.48 1240.35,461.65 1379,323 v1(1473,323)
NetD1_2: D1.2 Q1.1 Q2.3 R3.1 | length 1547.8
  Top Layer w10: D1.2 580.4,494.4 629.21,543.21 Q2.3 683.43,542.79 731.4,542.79 829.83,641.21 830,641.21 ; 762.01,574.01 889,701 889,1000.99 936.04,1048.03 1005.16,1048.03 1038.46,1081.33 R3.1
  Top Layer w15: R3.1 1100.59,1098 ccw(c1100.59,1101.41) v1(1103,1099) ; Q1.1 1419.4,1303.86 ccw(c1424.86,1303.86) v1(1421,1300)
  Bottom Layer w15: v1(1103,1099) 1178.58,1099 ccw(c1178.58,1199) 1249.29,1128.29 v1(1421,1300)
NetF1_1: F1.1 USB.1 | length 369.5
  Top Layer w15: USB.1 275.24,1360.68 cw(c275.24,1283.24) 330,1338 341.59,1326.41 cw(c270.88,1255.7) 370.88,1255.7 F1.1@370.88,1117
NetFA_1: FA.1 FC3.1 FC4.2 FC12.2 | length 517.6
  Top Layer w20: FC4.2@2031.08,1348.32 FC4.2@2031.86,1348.32 ; FC12.2 cw(c2140.43,1347.26) 2136.39,1347.26 2136.39,1559.85 cw(c2193.21,1559.85) 2153.03,1600.03 cw(c2194,1559.06) FA.1@2194,1617
  Top Layer w25: FC4.2 FC12.2 2232.24,1344.4 ccw(c2232.24,1357.77) FC3.1@2241.69,1348.32
NetFA_3: FA.3 FC2.1 FC8.1 FC9.2 FC13.2 | length 644.5
  Top Layer w10: FC2.1 1521.31,1361.71 cw(c1592.02,1291) 1592.02,1391 1633.7,1391 cw(c1633.7,1291) 1704.41,1361.71 FC8.1@1714,1352.12
  Top Layer w17.72: FA.3 1719.58,1476 cw(c1719.58,1376) 1790.29,1446.71 1791.14,1445.86 cw(c1720.43,1375.15) 1820.43,1375.15 FC13.2 ; FC8.1 ccw(c1717.13,1347.82) FC8.1@1717.13,1344.4 ; FC9.2@1924.78,1349.32 FC9.2@1925.78,1348.32
  Top Layer w25: FC8.1@1717.13,1344.4 FC13.2 FC9.2
NetFC2_2: FC2.2 FR2.2 | length 746.3
  Top Layer w10: FC2.2 1536.47,1237.13 ccw(c1573,1273.67) v2(1573,1222) ; FR2.2 1737,819 1756.88,838.88 1797.88,838.88 v2(1817,858)
  Bottom Layer w10: v2(1573,1222) 1631.58,1222 cw(c1631.58,1122) 1702.29,1192.71 1709.71,1185.29 cw(c1639,1114.58) 1739,1114.58 1817,1036.58 v2(1817,858)
NetFC3_2: FC3.2 FC5.1 L3.2 | length 326.2
  Top Layer w20: FC3.2 cw(c2245.7,1267.18) 2245.7,1270.6 2349,1270.6 2390.69,1270.6 cw(c2390.69,1203.69) 2438,1251 cw(c2380.06,1193.06) 2462,1193.06 L3.2
NetFC7_2: FC7.2 FC8.2 L4.2 | length 807.3
  Top Layer w20: FC7.2 FC8.2 1753.02,1232.29 ccw(c1823.73,1303) 1823.73,1203 2276.47,1203 cw(c2276.47,1124.47) 2332,1180 cw(c2288.54,1136.54) 2350,1136.54 L4.2@2350,1130.4
NetFC10_1: FC10.1 IC1.1 Y2.1 | length 266
  Top Layer w10: Y2.1 2092.27,449.37 ccw(c2092.27,523.32) 2144.57,471.03 ccw(c2106.09,509.5) 2159.98,502 ; IC1.1 2206.38,548 ccw(c2206.38,503.62) 2175,535 2172.69,532.69 ccw(c2203.38,502) 2160.49,508.65 ; 2159.98,502 ccw(c2106.09,509.5) 2160.49,508.65 ; 2159.98,502 cw(c2203.38,502) 2160.49,508.65
NetFC11_1: FC11.1 IC1.24 Y2.3 | length 274.5
  Top Layer w10: FC11.1 FC11.1@1838.71,449.18 ; IC1.24 1850.31,548 ccw(c1850.31,520.69) 1831,540 ccw(c1862.38,508.62) 1818,508.62 ccw(c1913.64,508.62) FC11.1@1838.71,449.18 ; Y2.3 cw(c1927.79,398.19) 1908.3,378.7 1846.01,440.99 cw(c1913.64,508.62) FC11.1@1838.71,449.18
NetL1_2: L1.2 L3.1 | length 102.2
  Top Layer w20: L1.2@2462,953.4 L3.1@2462,1055.6
NetL2_2: L2.2 L4.1 | length 102.2
  Top Layer w20: L2.2@2350,953.4 L4.1@2350,1055.6
NetQ2_2: Q2.2 R5.2 | length 397.9
  Top Layer w10: R5.2 501.54,513.46 541,474 541,424 567,398 673.61,398 Q2.2
NetR1_1: R1.1 U2.8 | length 529.7
  Top Layer w10: R1.1 646.71,1118.54 cw(c646.71,1116.71) v1(648,1118) ; v1(821,1376) 843.29,1353.71 ccw(c888.46,1398.87) U2.8
  Bottom Layer w10: v1(648,1118) 648,1282.58 cw(c748,1282.58) 677.29,1353.29 cw(c732.12,1298.46) 732.12,1376 v1(821,1376)
NetR2_2: R2.2 U2.2 | length 105.2
  Top Layer w20: R2.2 cw(c613.44,1256.1) 600.18,1281.78 cw(c607.95,1274.01) 607.95,1285 U2.2
NetU3_5: U3.5 USB.3 | length 775.1
  Top Layer w15: USB.3 252.48,1309.5 cw(c252.48,1280.48) 273,1301 cw(c256.06,1284.06) 280.02,1284.06 280.02,1061.4 ccw(c380.02,1061.4) 309.31,990.69 ; 312.71,987.29 ccw(c383.42,1058) 383.42,958 ; 392.13,958 cw(c392.13,881.06) 446.54,935.46 v1(476,906) ; v1(581.83,855) U3.5@658.48,855
  Bottom Layer w15: v1(476,906) 497.71,884.29 ccw(c568.42,955) 568.42,855 v1(581.83,855)
NetU3_6: U3.6 USB.2 | length 835.2
  Top Layer w15: USB.2 258.98,1335.09 cw(c258.98,1286.98) 293,1321 cw(c261.62,1289.62) 306,1289.62 306,1073.01 ccw(c405.01,1073.01) 335,1003 ccw(c380.87,1048.87) 380.87,984 cw(c380.87,836.42) 485.23,940.77 530.25,895.75 cw(c499.49,864.98) 543,864.98 ccw(c586.4,864.98) 555.71,834.29 ccw(c626.42,905) 626.42,805 U3.6@658.48,805
NRST: C6.1 P1.3 U1.1 | length 268.2
  Top Layer w10: P1.3 981.18,852.18 cw(c1051.89,781.46) 1051.89,881.46 C6.1 ; C6.1@1072,881 1072,881.46 1081.01,881.46 cw(c1081.01,843.98) 1107.49,870.51 ; 1107.53,870.47 cw(c1087.03,850) 1116,850 1116,830.31 ccw(c1143.31,830.31) 1116.99,823.03 ccw(c1143.31,830.31) 1124,811 ccw(c1142.74,829.74) 1142.74,803.24 U1.1
RX: FR1.2 FR2.1 IC1.21 | length 232.9
  Top Layer w10: FR1.2@1737,604.4 1737.5,604.9 1737.5,659.6 1737,660.1 1737,698 IC1.21@1875.9,698
SCK: IC1.13 U1.22 | length 672.9
  Top Layer w10: U1.22 1547.24,740.24 v1(1603,796) ; v1(1584,847) 1584,998 1684,1098 IC1.13
  Bottom Layer w10: v1(1584,847) 1603,828 v1(1603,796)
SET: D1.3 SET.2 SET_.2 U1.13 | length 2230.7
  Top Layer w10: v1(123,931) 122.31,930.31 SET.2 234,772.41 234,634 294,574 381,574 ; D1.3 512.21,574 381,574 ; U1.13 1350.75,497.75 1207,354 436,354 381,409 381,574
  Bottom Layer w10: SET_.2@74,828 123,877 v1(123,931) 123,1032 SET_.2@74,1081
SWIM: P1.4 U1.26 | length 521.1
  Top Layer w15: P1.4 982.71,953.71 cw(c1053.42,883) 1053.42,983 1211.58,983 cw(c1211.58,883) 1282.29,953.71 1290,946 ccw(c1347.94,1003.94) 1347.94,922 1372.27,922 cw(c1372.27,891.27) 1394,913 cw(c1346.34,865.34) 1413.74,865.34 U1.26
TX1: IC1.4 L1.1 | length 387.9
  Top Layer w20: IC1.4@2195.1,698 2314.36,698 ccw(c2314.36,854.07) 2424.71,743.71 2432.71,751.71 ccw(c2362,822.42) 2462,822.42 L1.1@2462,878.6
TX2: IC1.6 L2.1 | length 131.9
  Top Layer w20: IC1.6@2262.82,798 ccw(c2262.82,890.18) 2328,825 ccw(c2274.89,878.11) 2350,878.11 L2.1@2350,878.6
UP: U1.14 UP.2 UP_.2 | length 1809.1
  Top Layer w10: v1@122.31,607.31 UP.2 223.44,562.1 363,422.54 363,401.54 431.54,333 1227,333 1382.24,488.24 U1.14
  Bottom Layer w10: UP_.2@74,505 122.31,553.31 122.31,709.69 UP_.2@74,758
  other v1: 123,608
VCAP: C5.1 U1.5 | length 107
  Top Layer w10: C5.1@1072,642.54 ccw(c1072,699.36) 1112.18,659.18 1113,660 cw(c1154.65,618.35) 1154.65,677.25 U1.5
VCC: CC2.2 F1.2 R1.2 U2.4 U3.16 | length 809.7
  Top Layer w20: CC2.2@428.89,1244.54 cw(c428.89,1177.91) CC2.2@476,1225.02 ; F1.2@476,1103.12 CC2.2@476,1225.02 ; U2.4@688.48,1185 640.42,1185 cw(c640.42,1285) 569.71,1214.29 ccw(c543.8,1188.38) 543.8,1225.02 CC2.2@476,1225.02 ; v1(776,1056) 821.33,1056 822.33,1055.01 ccw(c823.42,1155) U3.16@822.88,1055 ; U3.16@843.52,1055 U3.16@823.42,1055 ; U3.16@822.88,1055 ccw(c823.42,1155) U3.16@823.42,1055 ; U3.16@822.88,1055 U3.16@823.42,1055
  Bottom Layer w20: v1(553,1220) 553,1156.42 ccw(c653,1156.42) 582.29,1085.71 582.71,1085.29 ccw(c653.42,1156) 653.42,1056 v1(776,1056)
VDD: B1.2 C7.1 CC3.2 D2.3 FC6.1 IC1.5 IC1.9 IC1.10 IC1.17 IC1.18 P1.1 pad.0@1520,944 pad.0@1675,878 Q1.3 U1.6 U1.7 U1.9 U4.3 | length 4120.1
  Top Layer w15: U4.3 873.21,544.21 P1.1 ; C7.1@1071,524 1071,588.73 ; U1.6 1224.76,645.76 1224.76,614.26 ; U1.9 1224.76,614.26 ; pad.0@1519,950 cw(c1504.51,964.49) 1504.51,944 1406.42,944 cw(c1406.42,1044) 1360.55,955.14 cw(c1406.42,1044) 1335.71,973.29 1311.29,997.71 ccw(c1240.58,927) 1240.58,1027 961.97,1027 ccw(c961.97,986.03) 933,1015 ccw(c976.46,971.54) 915,971.54 915,717 ccw(c980.18,717) 934.09,670.91 P1.1 ; D2.3 2398,466.21 B1.2 v1(2398,658) ; P1.1 ccw(c1015,638) 1015,590 1060.79,590 ccw(c1060.79,641.21) 1097,605 cw(c1119.36,582.64) 1119.36,614.26 U1.7 1224.76,614.26
  Top Layer w20: IC1.18@1875.9,848 IC1.18 ; IC1.9 IC1.9@2238.1,948 ; IC1.10 IC1.10@2238.1,998
  Top Layer w25: Q1.3 1400.13,1229.66 ccw(c1450,1279.53) 1450,1209 1470.62,1209 cw(c1470.62,1164.62) 1502,1196 cw(c1437.98,1131.98) 1528.52,1131.98 CC3.2 ccw(c1551.5,1078.02) 1519,1078.02 pad.0@1519,950 ; pad.0@1675,878 cw(c1676.29,876.71) 1676.29,878.54 FC6.1 1782,878.54 1801.46,898 IC1.17 1962,898 ; IC1.18 1951,848 1962,859 1962,898 ; IC1.9 2161,948 ; IC1.10 2174,998 2161,985 2161,948 ; v1(2319,747) 2318,748 IC1.5 2139,748 2045,842 2045,898 ; 1962,898 2045,898 ; 2045,898 2095,948 2161,948
  Bottom Layer w15: v1(2319,747) 2349,747 2398,698 v1(2398,658)
  Bottom Layer w25: pad.0@1520,944 1544.71,907.29 ccw(c1615.42,978) 1615.42,878 pad.0@1675,878
VMID: FC0.2 FR1.1 IC1.22 | length 351.6
  Top Layer w10: FC0.2@1742,414.4 1737,419.4 1737,529.6 1775.13,529.6 ccw(c1775.13,554.87) 1793,537 ccw(c1771.27,558.73) 1802,558.73 1802,625.93 cw(c1819.07,625.93) 1807,638 cw(c1831.14,613.86) 1831.14,648 IC1.22@1875.9,648
pads on no net: BAT.0 DN.0 IC1.19 M1.1 M2.1 M3.1 P2.0 SET.0 U1.2 U1.3 U1.11 U1.12 U3.9 U3.10 U3.11 U3.12 U3.13 U3.14 U3.15 UP.0 USB.4 USB.8 USB.9

## Polygon pours and split planes (outlines as drawn)
GND on Top Layer "Top Layer-No Net" (solid, pour order 9): 130,1660 100,1660 ccw(c100,1560) 0,1560 0,1530 0,100 ccw(c100,100) 100,0 141,0 2550,0 ccw(c2550,100) 2650,100 2650,219 2650,1560 ccw(c2550,1560) 2550,1660 2494,1660

## Keep-outs
Keep-Out Layer:
  lines w10: 0,120 0,1530 cw(c130,1530) 130,1660 2520,1660 cw(c2520,1530) 2650,1530 2650,130 cw(c2520,130) 2520,0 130,0 cw(c130,130) 0,130

## Other copper
Top Layer:
  pour cut-out: 1985,1562 cw(c1985,1546) 2001,1546 cw(c1987,1546) 1987,1532 1972,1532 cw(c1972,1547) 1957,1547 cw(c1972,1547) 1972,1562
  pour cut-out: 2453,1475 cw(c2453,1422) 2506,1422 2506,187.9 cw(c2454,188) 2454,136 479,136 cw(c479,206) 409,206 409,1395 cw(c489,1395) 489,1475

## Silkscreen, mask and mechanical layers (free items; w line width, h text height)
Top Overlay:
  text "- +" at 1079,1130 h120
Mechanical 16:
  drawing of 1873 lines, arcs and shapes, not listed
  text "1" at -2479,4265 h70
  text "2" at 381,4265 h70
  text "3" at 3261,4265 h70
  text "4" at 6131,4265 h70
  text "A" at -3831,3359 h70
  text "A" at 7469,3359 h70
  text "B" at -3831,1467 h70
  text "B" at 7469,1467 h70
  text "C" at -3831,-443 h70
  text "ENGINEER:" at 2944,-1900 h45
  text "TITLE:" at 4444,-1900 h45
  text "PCB DESIGNER:" at 2944,-2195 h45
  text "D" at -3831,-2333 h70
  text "D" at 7469,-2333 h70
  text "DATE:" at 2944,-2500 h45
  text "PART NO.:" at 4444,-2500 h45
  text "REV:" at 6544,-2500 h45
  text "Altium Limited" at 1644,-2600 h70
  text ".PRINT_DATE" at 2994,-2620 h70
  text "12a Rodborough Rd" at 1644,-2700 h70
  text "Frenchs Forest" at 1644,-2800 h70
  text "FILE NAME:" at 2944,-2800 h45
  text "DWG NO:" at 4444,-2800 h45
  text "SCALE:" at 6544,-2800 h45
  text "NSW 2086" at 1644,-2900 h70
  text ".PCB_FILE_NAME_NO_PATH" at 2994,-2920 h70
  text "1" at -2479,-3135 h70
  text "2" at 381,-3135 h70
  text "3" at 3261,-3135 h70
  text "4" at 6131,-3135 h70

## Text inside footprints (layer, text, board x,y; h text height)
P2: Bottom Overlay "14" at 1186,566 h30 r180; Bottom Overlay "1" at 1706,562 h30 r180